# Altium PCB uz_frontpanel_main-mini.PcbDoc
Units mm, origin at the board's own origin, x right, y up, seen from the top; angles counter-clockwise.
Board outline 22 x 53.5 mm, 8 copper layers (Top Layer, Int1 (GND), Int2 (Sign), Int3 (Sign), Int4 (Sign), Int5 (Sign), Int6 (GND), Bottom Layer), stack 1.6 mm thick; 38 components, 81 nets, 194 pads, 58 vias.
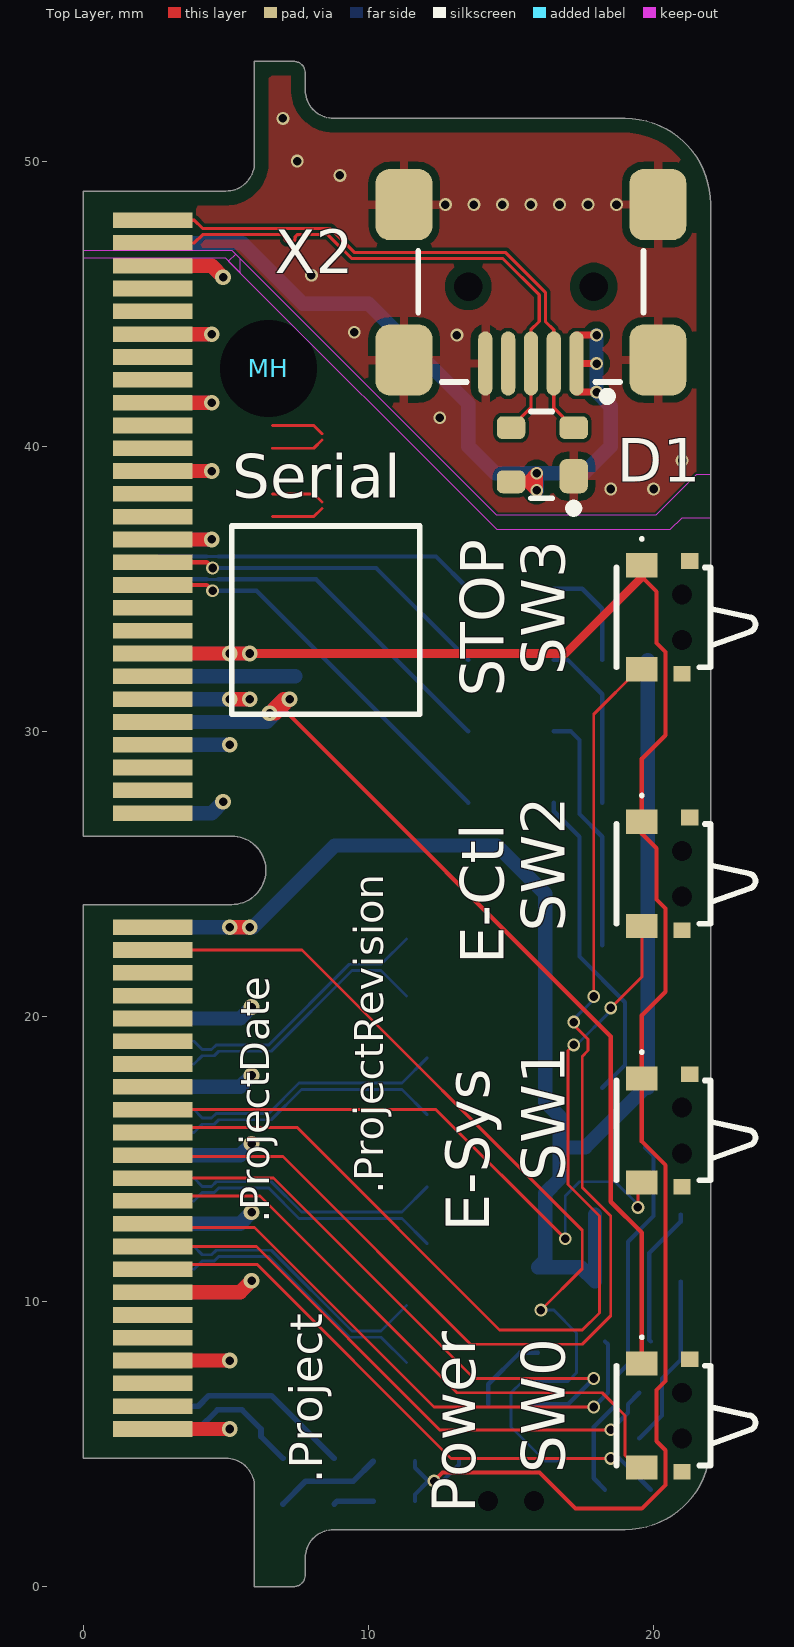
[diagram p0: Top Layer view]
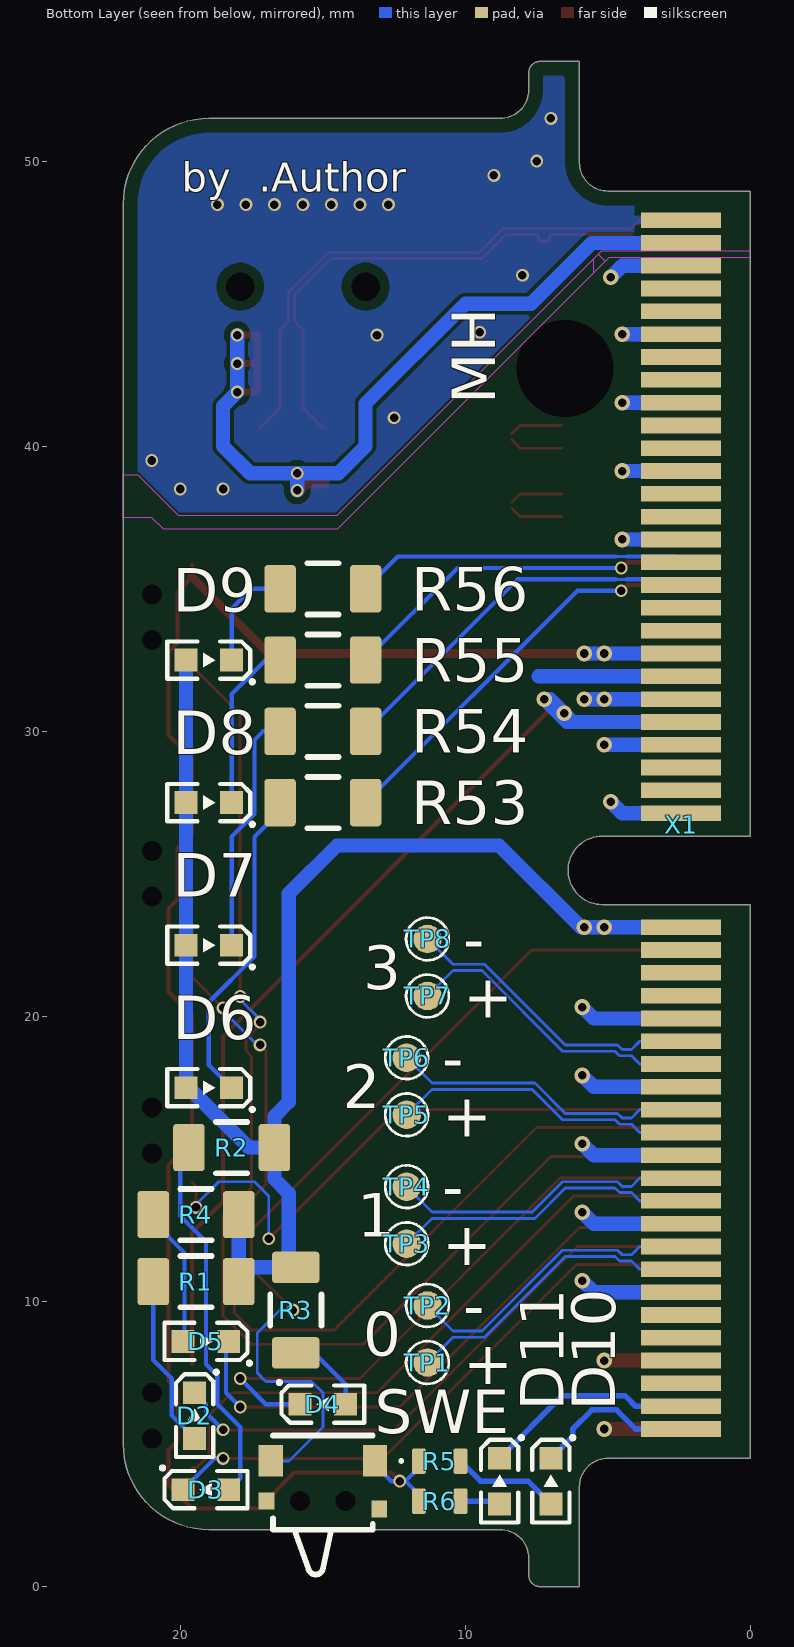
[diagram p1: Bottom Layer view, seen from below]
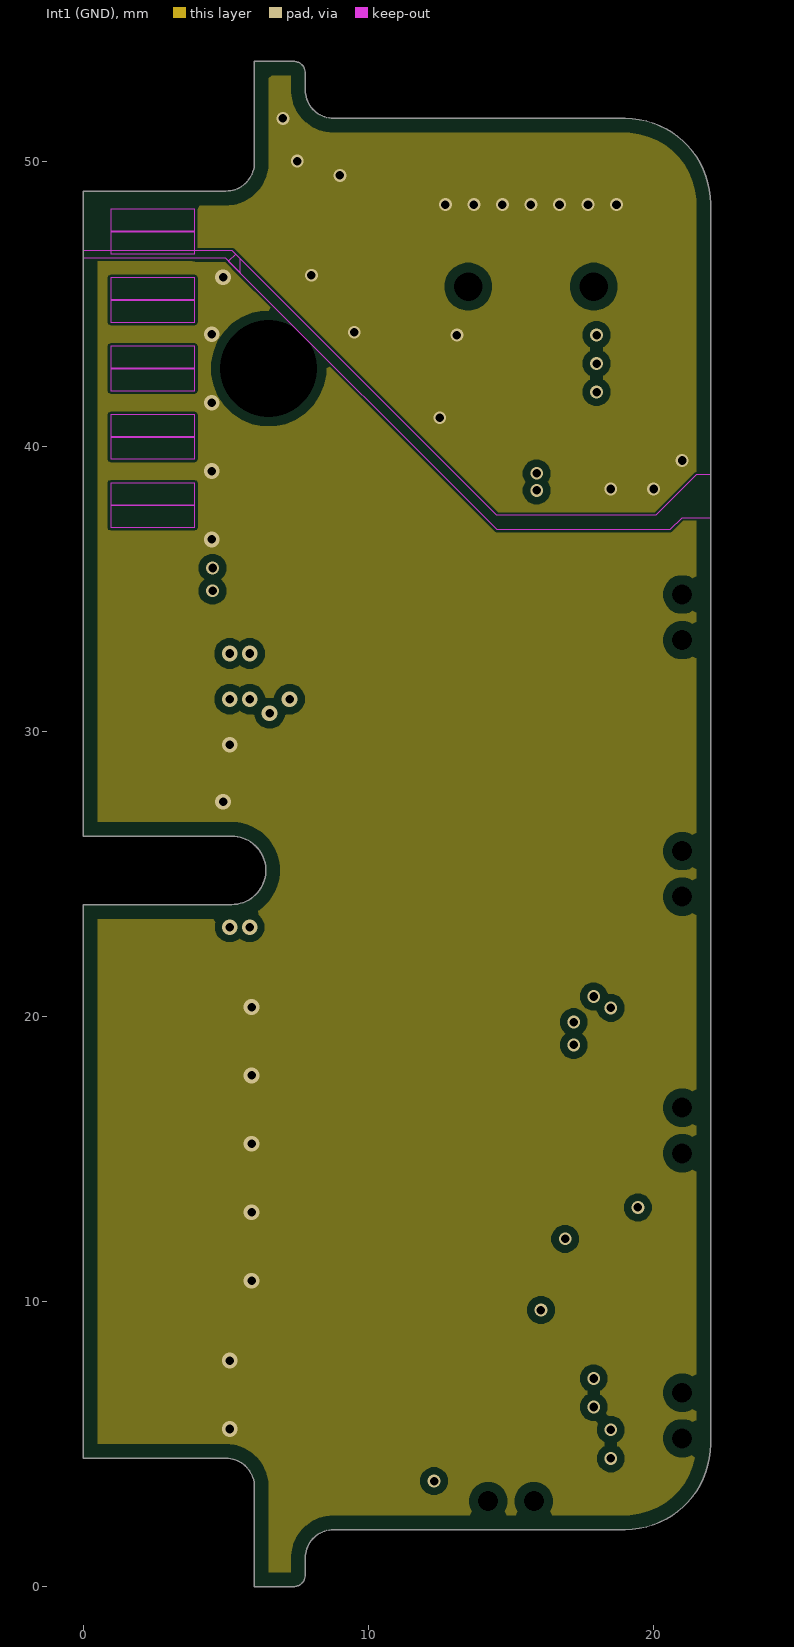
[diagram p2: Int1 (GND)]
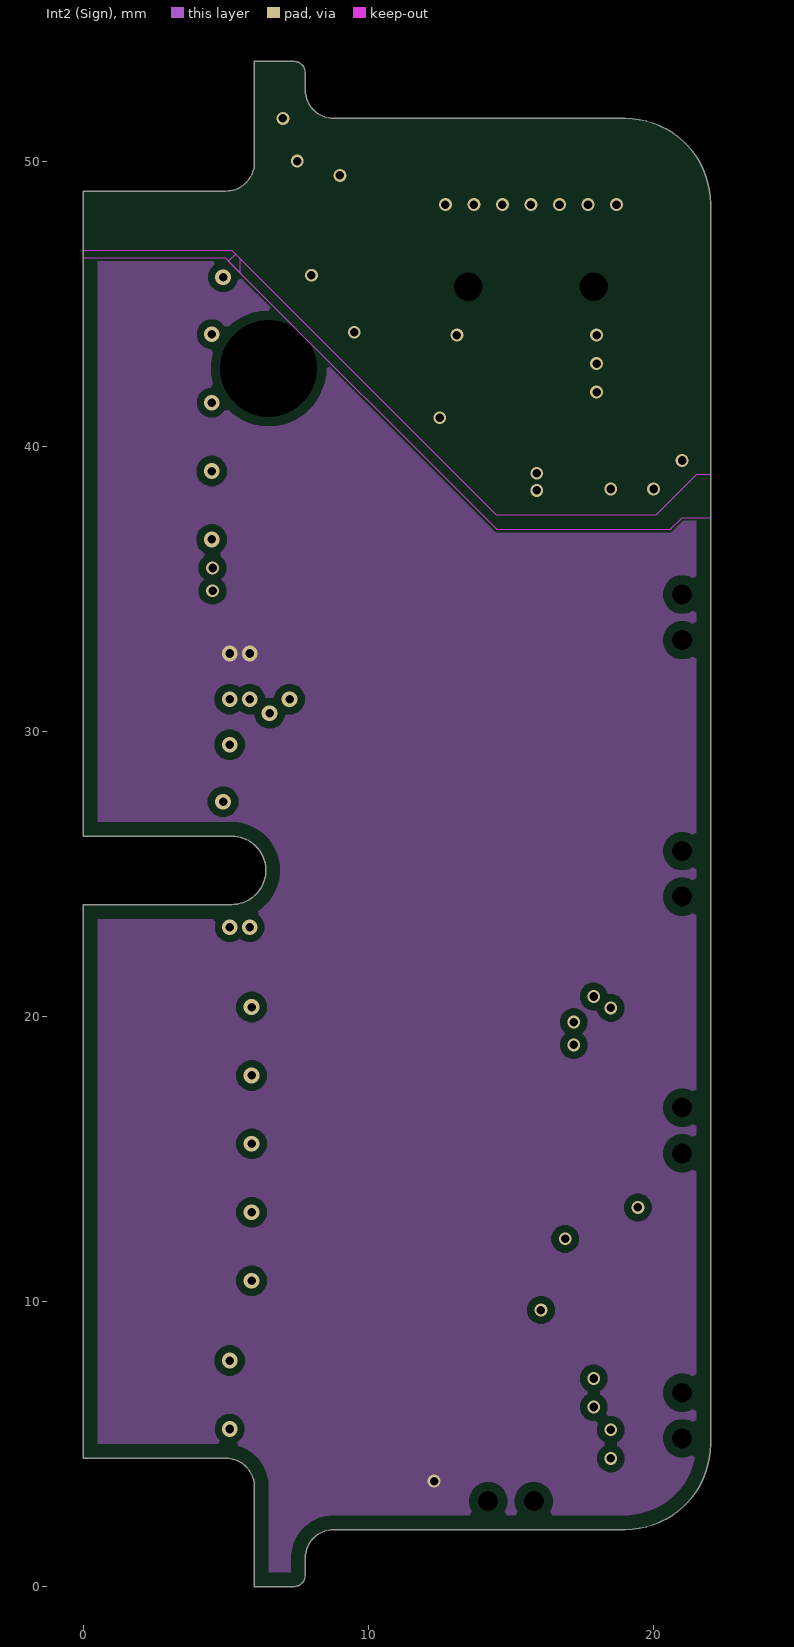
[diagram p3: Int2 (Sign)]
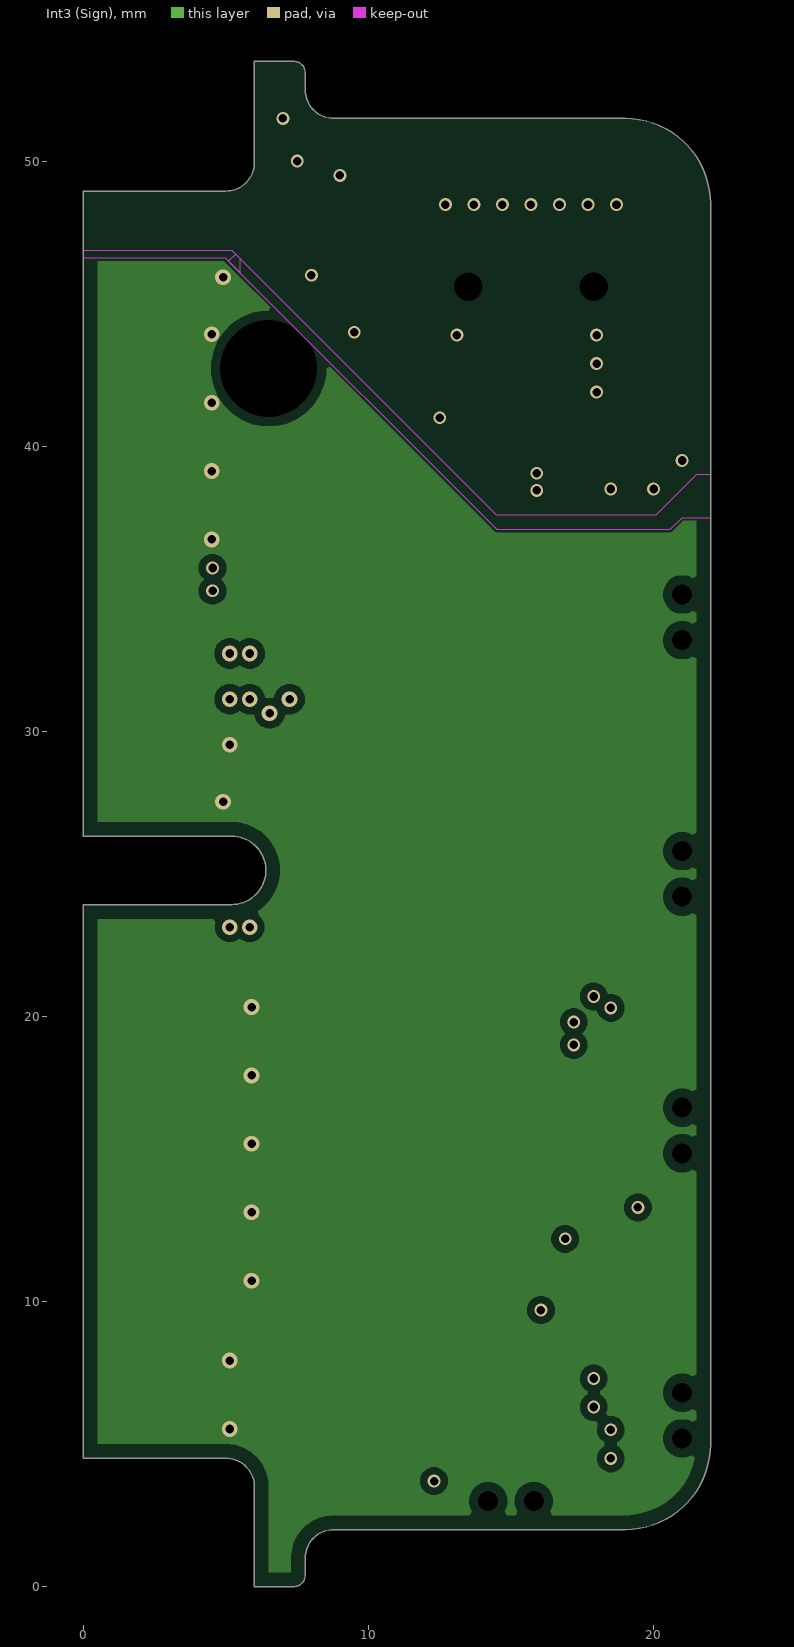
[diagram p4: Int3 (Sign)]
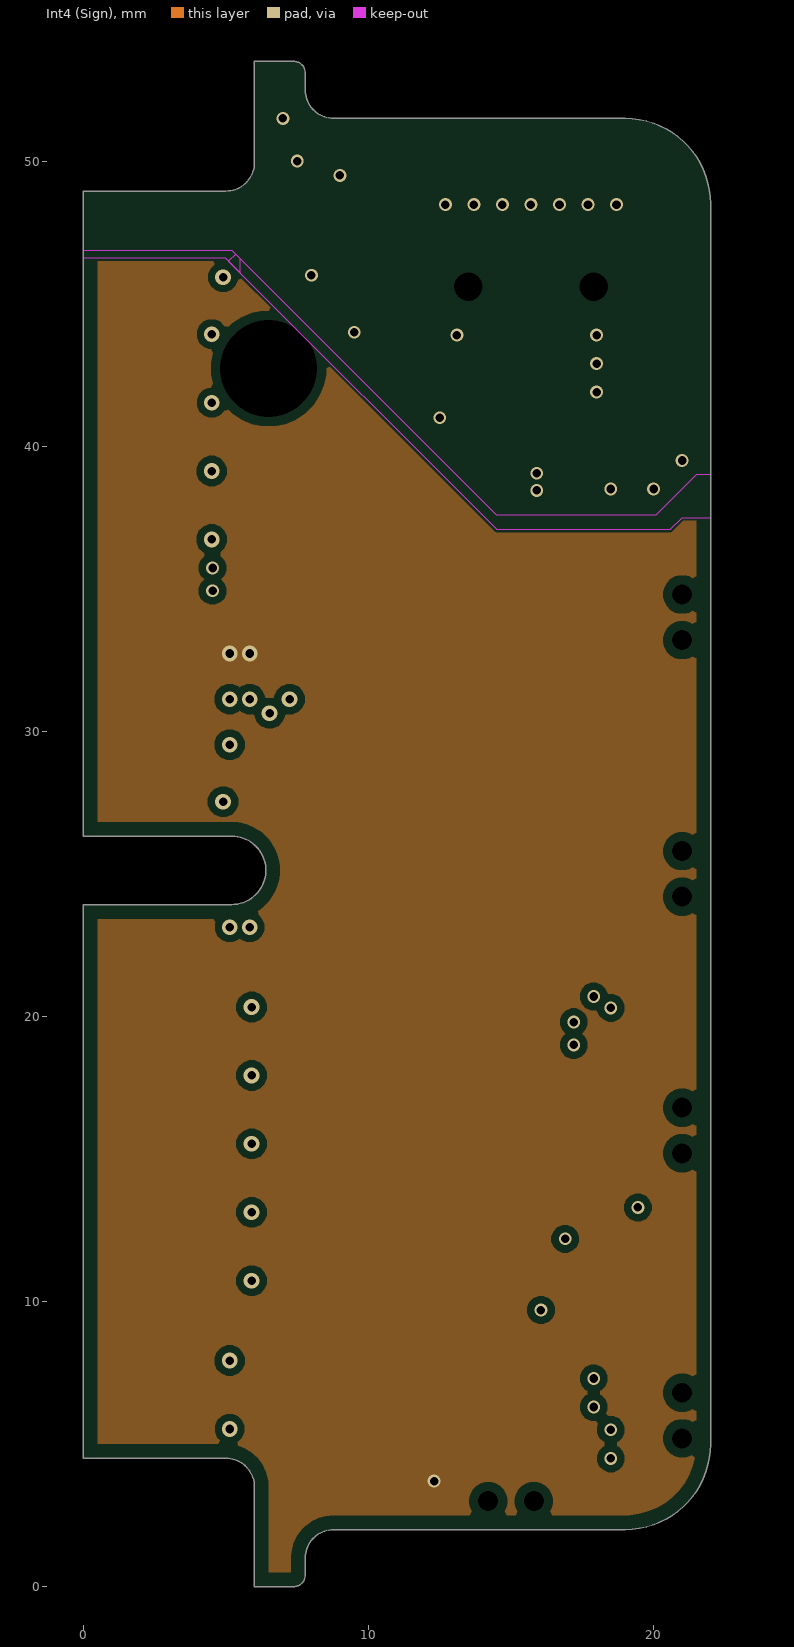
[diagram p5: Int4 (Sign)]
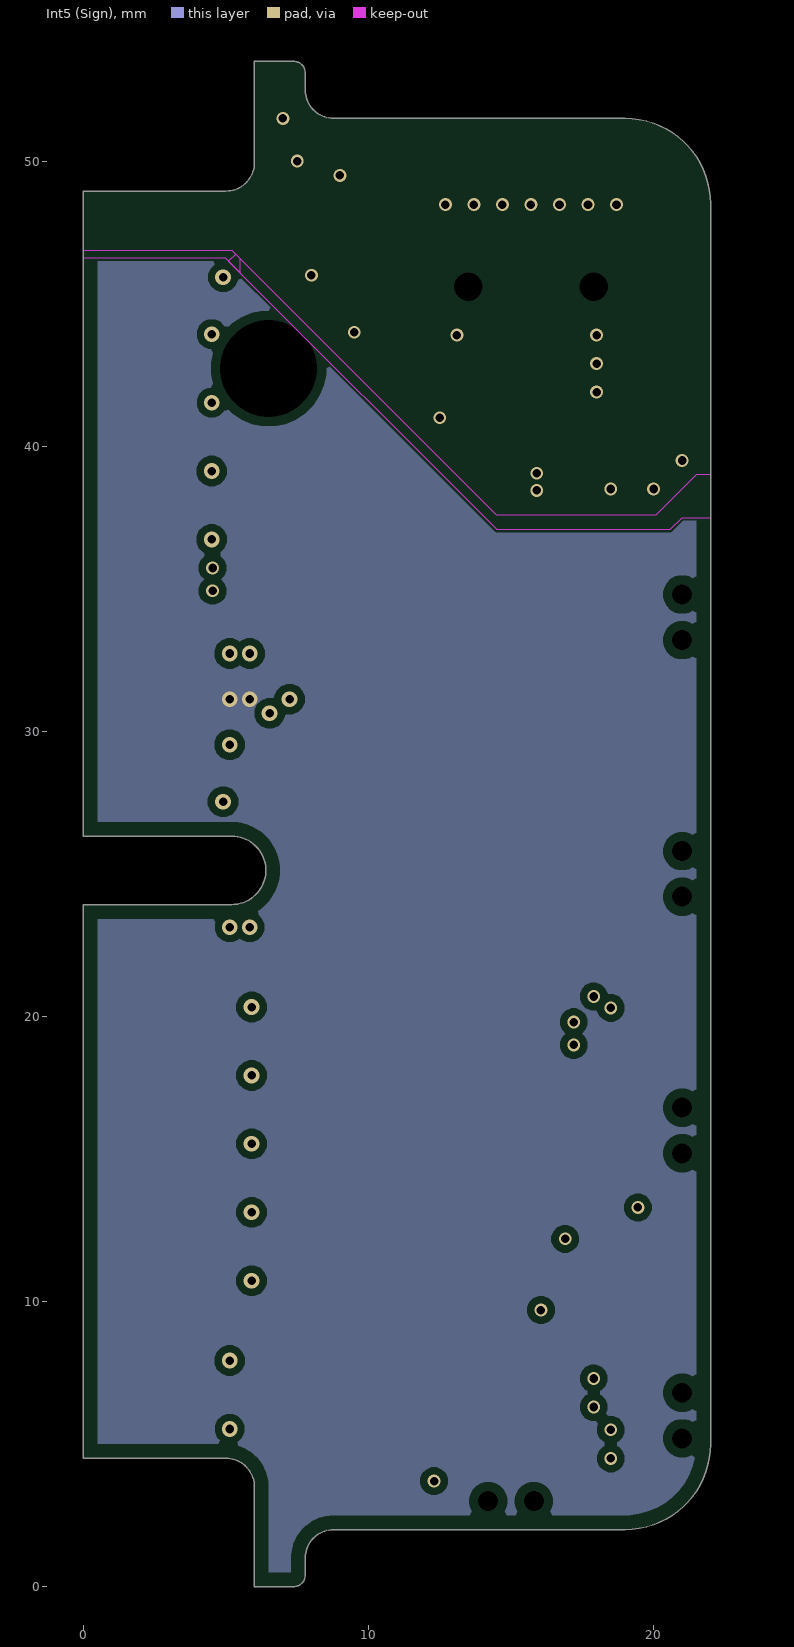
[diagram p6: Int5 (Sign)]
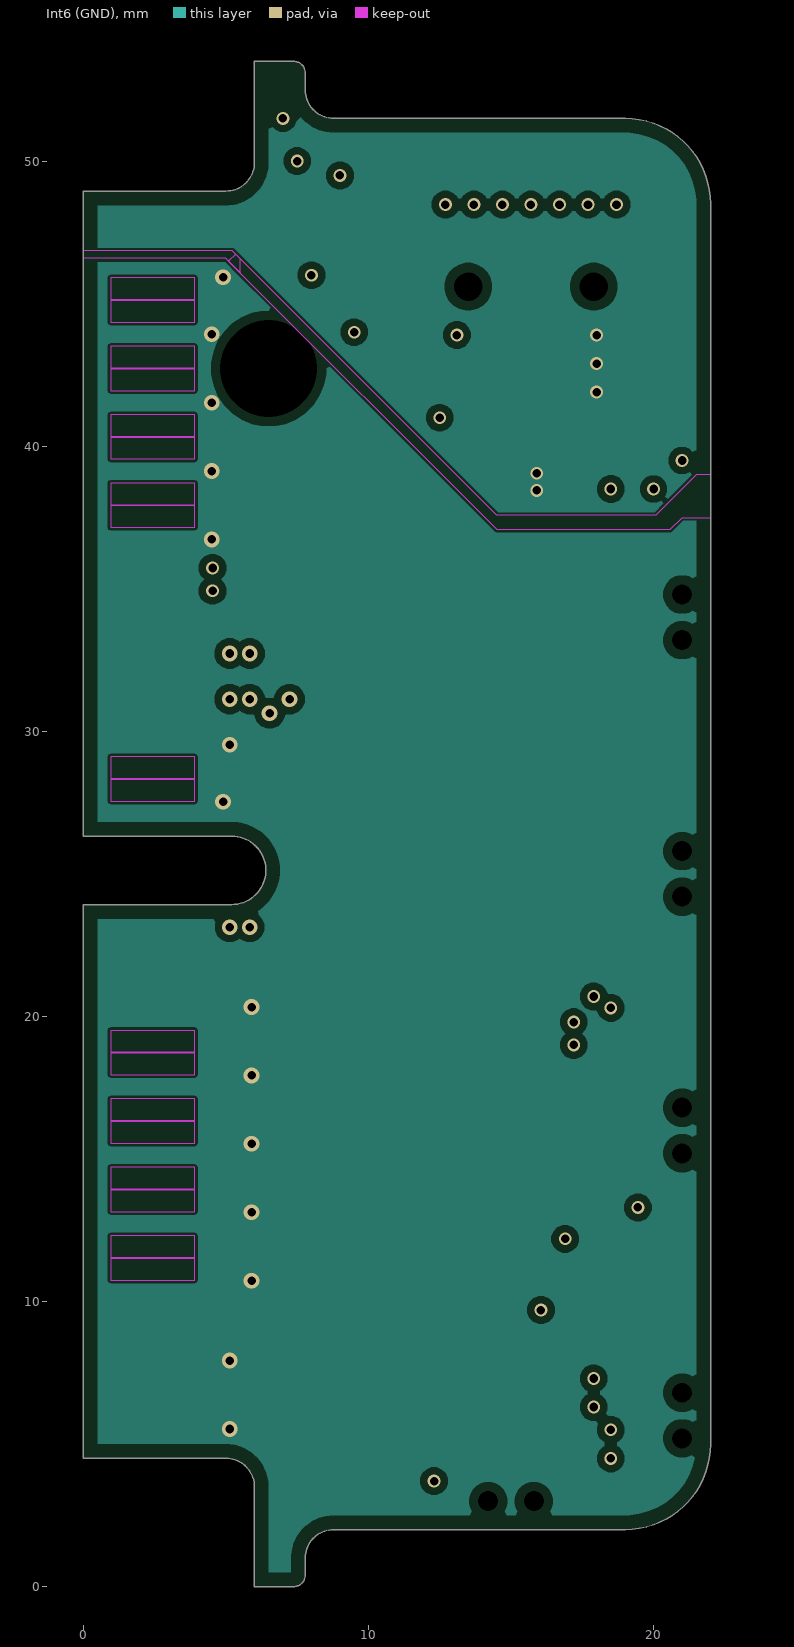
[diagram p7: Int6 (GND)]
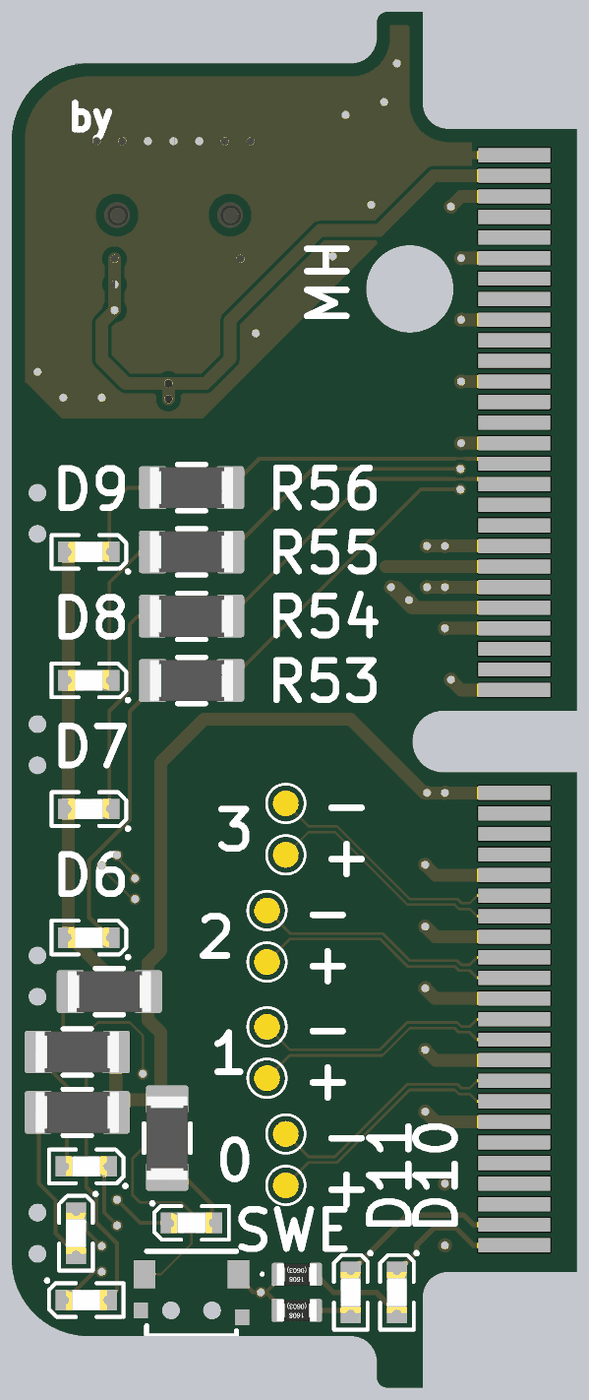
[diagram p8: 3D render of the assembled board from below, using the file's embedded part models]

## Layer stack, top to bottom
Top Solder: solder mask 0.0305, SM-001, Dk 3.8
Top Layer: signal copper 0.035
Dielectric 1: prepreg 0.1164, PP-016, Dk 4.16
Int1 (GND): signal copper 0.0152
Dielectric 3: core 0.3, Core-027, Dk 4.6
Int2 (Sign): signal copper 0.0152
Dielectric 4: prepreg 0.0764, PP-008, Dk 3.91
Dielectric 5: prepreg 0.0764, PP-008, Dk 3.91
Int3 (Sign): signal copper 0.0152
Dielectric 6: core 0.3, Core-027, Dk 4.6
Int4 (Sign): signal copper 0.0152
Dielectric 7: prepreg 0.0764, PP-008, Dk 3.91
Dielectric 8: prepreg 0.0764, PP-008, Dk 3.91
Int5 (Sign): signal copper 0.0152
Dielectric 9: core 0.3, Core-027, Dk 4.6
Int6 (GND): signal copper 0.0152
Dielectric 11: prepreg 0.1164, PP-016, Dk 4.16
Bottom Layer: signal copper 0.035
Bottom Solder: solder mask 0.0305, SM-001, Dk 3.8

## Board outline
0,4.5 5,4.5 cw(c5,3.5) 6,3.5 6,0 7.38,0 ccw(c7.38,0.4) 7.78,0.4 7.78,1 cw(c8.78,1) 8.78,2 19,2 ccw(c19,5) 22,5 22,48.5 ccw(c19,48.5) 19,51.5 8.78,51.5 cw(c8.78,52.5) 7.78,52.5 7.78,53.1 ccw(c7.38,53.1) 7.38,53.5 6,53.5 6,50 6,49.95 cw(c5,49.95) 5,48.95 0,48.95 0,26.325 5.2,26.325 cw(c5.2,25.125) 5.2,23.925 0,23.925

## Design rules (kind name [scope] priority, off if disabled: settings)
AssemblyTestPointUsage [InNetClass('3V3_SingleEnded') or InNetClass('5V_SingleEnded') or InNetClass('15V_SingleEnded') or InNetClass('DifferentialSignals')] p1:
BoardOutlineClearance [All] p1: gap=0.5 ignorepadtopadclearanceinfootprint=FALSE except(0: Arc-SplitContinuation Track-SplitContinuation SMDPad-SplitContinuation THPad-SplitContinuation Via-SplitContinuation Fill-SplitContinuation Poly-SplitContinuation Region-SplitContinuation Text-SplitContinuation)
Clearance Clearance_Diff2Diff [InNetClass('D100') OR InNetClass('MGT') OR InNetClass('USB')] p1: gap=0.127 ignorepadtopadclearanceinfootprint=TRUE except(0: Text-Hole; 0.1: Arc-Text Track-Text SMDPad-Text THPad-Text Via-Text Fill-Text Poly-Text Region-Text Text-Text; 0.2: Arc-SMDPad Arc-THPad Arc-Via Track-SMDPad Track-THPad Track-Via SMDPad-THPad SMDPad-Via Via-Via; 0.254: THPad-Fill THPad-Poly THPad-Region Via-Fill Via-Poly Via-Region; 0.325: Via-Hole; 0.33: Arc-Hole Track-Hole SMDPad-Hole THPad-Hole Fill-Hole Poly-Hole Region-Hole; 0.35: THPad-Via; 0.5: THPad-THPad Fill-Fill Fill-Poly Fill-Region Poly-Poly Poly-Region Region-Region; 0.57: Arc-Arc Arc-Track Track-Track)
Clearance Clearance_Diff2!DiffOrPwr [InNetClass('D100') OR InNetClass('MGT') OR InNetClass('USB') vs NOT ( InNetClass('D100') OR InNetClass('MGT') OR InNetClass('USB') OR InNetClass('PWR') )] p2: gap=0.127 ignorepadtopadclearanceinfootprint=TRUE except(0: Text-Hole; 0.1: Arc-Text Track-Text SMDPad-Text THPad-Text Via-Text Fill-Text Poly-Text Region-Text Text-Text; 0.2: Arc-SMDPad Arc-THPad Arc-Via Track-SMDPad Track-THPad Track-Via SMDPad-THPad SMDPad-Via Via-Via; 0.254: THPad-Fill THPad-Poly THPad-Region Via-Fill Via-Poly Via-Region; 0.325: Via-Hole; 0.33: Arc-Hole Track-Hole SMDPad-Hole THPad-Hole Fill-Hole Poly-Hole Region-Hole; 0.35: THPad-Via; 0.5: THPad-THPad Fill-Fill Fill-Poly Fill-Region Poly-Poly Poly-Region Region-Region; 0.57: Arc-Arc Arc-Track Track-Track)
Clearance ClearanceNetsDifferent [All] p3: gap=0.1 ignorepadtopadclearanceinfootprint=TRUE except(0: Region-Hole Text-Hole; 0.12: Track-Via; 0.127: Track-Fill Track-Poly Track-Region SMDPad-SMDPad SMDPad-Fill SMDPad-Poly SMDPad-Region; 0.2: Track-SMDPad Track-THPad Track-Hole SMDPad-THPad SMDPad-Via Via-Via; 0.254: THPad-Fill THPad-Poly THPad-Region Via-Fill Via-Poly Via-Region; 0.325: Via-Hole; 0.33: Arc-Hole SMDPad-Hole THPad-Hole Fill-Hole Poly-Hole; 0.35: THPad-Via; 0.5: THPad-THPad Fill-Fill Poly-Poly Region-Region)
Clearance ClearanceNetsSame [All] p4: gap=0.1 ignorepadtopadclearanceinfootprint=TRUE except(0: Arc-Arc Arc-Track SMDPad-Via Via-Via Region-Hole Text-Hole; 0.127: Track-Fill Track-Poly Track-Region SMDPad-SMDPad SMDPad-Fill SMDPad-Poly SMDPad-Region; 0.129: Via-Hole; 0.2: SMDPad-THPad; 0.254: Track-Hole SMDPad-Hole THPad-Fill THPad-Poly THPad-Region Via-Fill Via-Poly Via-Region; 0.33: Arc-Hole THPad-Hole Fill-Hole Poly-Hole; 0.35: THPad-Via; 0.5: THPad-THPad Fill-Fill Poly-Poly Region-Region)
ComponentClearance [All] p1: gap=0.1 collisioncheckmode=3 verticalgap=0.1 showdistances=FALSE
DiffPairsRouting DiffPairsRouting_D100 [InNetClass('D100') OR InNetClass('MGT')] p1: maxlimit=0.167 minlimit=0.122 mostfreqgap=0.167 toplayer_mingap=0.122 toplayer_maxgap=0.122 toplayer_prefgap=0.122 toplayer_minwidth=0.1 toplayer_maxwidth=0.1 toplayer_prefwidth=0.1 midlayer2_maxgap=0.122 midlayer2_prefgap=0.122 midlayer2_minwidth=0.1 midlayer2_maxwidth=0.1 midlayer2_prefwidth=0.1 midlayer3_maxgap=0.122 midlayer3_prefgap=0.122 midlayer3_minwidth=0.1 midlayer3_maxwidth=0.1 midlayer3_prefwidth=0.1 bottomlayer_mingap=0.122 bottomlayer_maxgap=0.122 bottomlayer_prefgap=0.122 bottomlayer_minwidth=0.1 bottomlayer_maxwidth=0.1 bottomlayer_prefwidth=0.1 impedanceprofiledriven=TRUE impedanceprofileid={92C7DD9C-2956-4AB4-8EC1-0CC9A5262CD3} impedanceprofilevalue=100.000000 maxuncoupledlength=12.7
DiffPairsRouting DiffPairsRouting_USB [InNetClass('USB')] p2: maxlimit=0.102 minlimit=0.1 mostfreqgap=0.1 toplayer_maxgap=0.1 toplayer_minwidth=0.114 toplayer_maxwidth=0.114 toplayer_prefwidth=0.114 midlayer2_maxgap=0.1 midlayer2_minwidth=0.118 midlayer2_maxwidth=0.118 midlayer2_prefwidth=0.118 midlayer3_maxgap=0.1 midlayer3_minwidth=0.118 midlayer3_maxwidth=0.118 midlayer3_prefwidth=0.118 bottomlayer_maxgap=0.1 bottomlayer_minwidth=0.114 bottomlayer_maxwidth=0.114 bottomlayer_prefwidth=0.114 impedanceprofiledriven=TRUE impedanceprofileid={0D8B0DFD-34C5-4572-9476-DD2B079BA94C} impedanceprofilevalue=90.000000 maxuncoupledlength=12.7
DiffPairsRouting DiffPairsRouting_CatchAll [IsDifferentialPair] p3: maxlimit=5 minlimit=0.254 mostfreqgap=5 toplayer_mingap=5 toplayer_minwidth=1 toplayer_maxwidth=1 toplayer_prefwidth=1 midlayer1_mingap=5 midlayer1_minwidth=1 midlayer1_maxwidth=1 midlayer1_prefwidth=1 midlayer2_mingap=5 midlayer2_minwidth=1 midlayer2_maxwidth=1 midlayer2_prefwidth=1 midlayer3_mingap=5 midlayer3_minwidth=1 midlayer3_maxwidth=1 midlayer3_prefwidth=1 midlayer4_mingap=5 midlayer4_minwidth=1 midlayer4_maxwidth=1 midlayer4_prefwidth=1 midlayer5_maxgap=0.254 midlayer5_prefgap=0.254 midlayer5_minwidth=0.381 midlayer5_maxwidth=0.381 midlayer5_prefwidth=0.381 midlayer6_maxgap=0.254 midlayer6_prefgap=0.254 midlayer6_minwidth=0.381 midlayer6_maxwidth=0.381 midlayer6_prefwidth=0.381 bottomlayer_mingap=5 bottomlayer_minwidth=1 bottomlayer_maxwidth=1 bottomlayer_prefwidth=1 maxuncoupledlength=12.7 // ... with obviously-unrealistic values to alert the designer
FanoutControl Fanout_Power [InNetClass('Power') or InNet('ENABLE')] p1: bgadir=Out bgaviamode=Centered fanoutstyle=Auto fanoutdirection=None viagrid=0.025
FanoutControl Fanout_RS422 [InNetClass('DifferentialSignals')] p2: bgadir=Out bgaviamode=Closest fanoutstyle=Rows fanoutdirection=OutOnly viagrid=0.025
FanoutControl Fanout_BGA [IsBGA] p3 off: bgadir=Out bgaviamode=Centered fanoutstyle=Auto fanoutdirection=Alternating viagrid=0.025 // Fanout_BGA (Default Rule)
FanoutControl Fanout_LCC [IsLCC] p4 off: bgadir=Out bgaviamode=Centered fanoutstyle=Auto fanoutdirection=Alternating viagrid=0.025 // Fanout_LCC (Default Rule)
FanoutControl Fanout_SOIC [IsSOIC] p5 off: bgadir=Out bgaviamode=Centered fanoutstyle=Auto fanoutdirection=Alternating viagrid=0.025 // Fanout_SOIC (Default Rule)
FanoutControl Fanout_Small [(CompPinCount < 5)] p6 off: bgadir=Out bgaviamode=Centered fanoutstyle=Auto fanoutdirection=OutThenIn viagrid=0.025 // Fanout_Small (Default Rule)
FanoutControl Fanout_Default [All] p7: bgadir=NE bgaviamode=Closest fanoutstyle=Rows fanoutdirection=InOnly viagrid=0.025 // Fanout_Default (Default Rule)
Height [All] p1: minheight=0 maxheight=50 prefheight=12.7
HoleSize [All] p1: absolutevalues=TRUE maxlimit=6.3 minlimit=0.2 maxpercent=80.000 minpercent=20.000
MatchedLengths MatchedLengthsIntra [InDifferentialPairClass('All Differential Pairs')  OR InxSignalClass('All xSignals')] p1: tolerance=0.127 checknetsindiffpair=TRUE checkdiffpairvsdiffpair=FALSE checkxsignals=FALSE checkothers=FALSE
MatchedLengths MatchedLengthsInter_ETH0 [InDifferentialPair('ETH0_0')  OR InDifferentialPair('ETH0_1')  OR InDifferentialPair('ETH0_2')  OR InDifferentialPair('ETH0_3')] p2: tolerance=0.508 checknetsindiffpair=FALSE checkdiffpairvsdiffpair=TRUE checkxsignals=TRUE checkothers=TRUE
MatchedLengths MatchedLengthsInter_MDI1R [InDifferentialPair('MDI1R_0')  OR InDifferentialPair('MDI1R_1')  OR InDifferentialPair('MDI1R_2')  OR InDifferentialPair('MDI1R_3')] p3: tolerance=0.508 checknetsindiffpair=FALSE checkdiffpairvsdiffpair=TRUE checkxsignals=TRUE checkothers=TRUE
MatchedLengths MatchedLengthsInter_CatchD100 [InNetClass('D100') AND NOT ( InDifferentialPair('ETH0_0')  OR InDifferentialPair('ETH0_1')  OR InDifferentialPair('ETH0_2')  OR InDifferentialPair('ETH0_3')  OR InDifferentialPair('MDI1R_0')  OR InDifferentialPair('MDI1R_1')  OR InDifferentialPair('MDI1R_2')  OR InDifferentialPair('MDI1R_3') )] p4: tolerance=0.01 checknetsindiffpair=FALSE checkdiffpairvsdiffpair=TRUE checkxsignals=TRUE checkothers=TRUE
PlaneConnect [All] p1: planeconnectstyle=Direct reliefexpansion=0.508 reliefentries=4 reliefconductorwidth=0.254 reliefairgap=0.254
PolygonConnect PolygonConnect_Therm [HoleSize > 2.6] p1: connectstyle=Direct reliefconductorwidth=0.254 reliefentries=4 polygonreliefangle="90 Angle" airgapwidth=0.254
PolygonConnect PolygonConnect_via [InPadClass('pad') or IsVia] p2: connectstyle=Direct reliefconductorwidth=0.254 reliefentries=4 polygonreliefangle="90 Angle" airgapwidth=0.254
PolygonConnect [All] p3: connectstyle=Relief reliefconductorwidth=0.3 reliefentries=4 polygonreliefangle="90 Angle" airgapwidth=0.25
RoutingLayers RoutingLayers_3V3Signals [InNetClass('3V3_SingleEnded')] p1 off: top layer_v5=TRUE mid layer 1_v5=TRUE mid layer 2_v5=TRUE mid layer 3_v5=TRUE mid layer 4_v5=TRUE mid layer 5_v5=TRUE mid layer 6_v5=TRUE bottom layer_v5=TRUE
RoutingLayers RoutingLayers_SingleEnded [InNetClass('15V_SingleEnded') or InNetClass('3V3_SingleEnded') or InNetClass('5V_SingleEnded')] p2 off: top layer_v5=TRUE mid layer 1_v5=TRUE mid layer 2_v5=TRUE mid layer 3_v5=TRUE mid layer 4_v5=TRUE mid layer 5_v5=TRUE mid layer 6_v5=TRUE bottom layer_v5=TRUE
RoutingLayers RoutingLayers_Differential [InNetClass('DifferentialSignals')] p3 off: top layer_v5=TRUE mid layer 1_v5=TRUE mid layer 2_v5=TRUE mid layer 3_v5=TRUE mid layer 4_v5=TRUE mid layer 5_v5=TRUE mid layer 6_v5=TRUE bottom layer_v5=FALSE
RoutingLayers [All] p4: top layer_v5=TRUE mid layer 1_v5=TRUE mid layer 2_v5=TRUE mid layer 3_v5=TRUE mid layer 4_v5=TRUE mid layer 5_v5=TRUE mid layer 6_v5=TRUE bottom layer_v5=TRUE
RoutingVias [All] p1: holewidth=0.3 width=0.5 viastyle="Through Hole" minholewidth=0.2 minwidth=0.4 maxholewidth=0.5 maxwidth=1
SolderMaskExpansion [All] p1: expansion=0.008 istentingtop=FALSE
UnRoutedNet UnRoutedNet_Signals [InNetClass('15V_SingleEnded') or InNetClass('3V3_SingleEnded') or InNetClass('5V_SingleEnded') or InNetClass('DifferentialSignals')] p1: checkbadconnections=TRUE
UnRoutedNet [All] p2: checkbadconnections=TRUE
Width Width_S50 [InNetClass('S50')] p1: maxlimit=0.184 minlimit=0.133 preferedwidth=0.172 toplayer_minwidth=0.184 toplayer_prefwidth=0.184 midlayer2_minwidth=0.172 midlayer2_maxwidth=0.172 midlayer3_minwidth=0.172 midlayer3_maxwidth=0.172 bottomlayer_minwidth=0.184 bottomlayer_prefwidth=0.184 impedanceprofiledriven=TRUE impedanceprofileid={DBC48055-3BDD-4D29-A398-A49D5C7E61E7} impedanceprofilevalue=50.000000 minimp=50.000000 maximp=50.000000 favimp=50.000000
Width Width_Power [InNetClass('Pwr')] p2: maxlimit=10 minlimit=0.2 preferedwidth=0.4 midlayer5_minwidth=0.254 midlayer5_maxwidth=0.254 midlayer5_prefwidth=0.254 midlayer6_minwidth=0.254 midlayer6_maxwidth=0.254 midlayer6_prefwidth=0.254 minimp=50.000000 maximp=50.000000 favimp=50.000000
Width [All] p3: maxlimit=10 minlimit=0.1 preferedwidth=0.15 toplayer_prefwidth=0.3 midlayer5_prefwidth=0.1 midlayer6_prefwidth=0.1 bottomlayer_prefwidth=0.3 minimp=50.000000 maximp=50.000000 favimp=50.000000
17 further rules are at their usual default settings.

## Classes and differential pairs
component class uz_frontpanel_main-mini: D1 D2 D3 D4 D5 D10 D11 MH R1 R2 R3 R4 R5 R6 Serial SW0 SW1 SW2 SW3 SWe TP1 TP2 TP3 TP4 TP5 TP6 TP7 TP8 X2
net class PWR: GND isoGND V_BUS VIN
net class USB: D_USB_N D_USB_P
net class MGT: B505_CLKa_N B505_CLKa_P GTR1_RX_N GTR1_RX_P GTR1_TX_N GTR1_TX_P GTR2_RX_N GTR2_RX_P GTR2_TX_N GTR2_TX_P
net class D100: ETH0_0_N ETH0_0_P ETH0_1_N ETH0_1_P ETH0_2_N ETH0_2_P ETH0_3_N ETH0_3_P
component class U_TestLEDs: D6 D7 D8 D9 R53 R54 R55 R56
component class X1: X1
differential pair GTR2_TX: +GTR2_TX_P -GTR2_TX_N
differential pair GTR2_RX: +GTR2_RX_P -GTR2_RX_N
differential pair GTR1_TX: +GTR1_TX_P -GTR1_TX_N
differential pair GTR1_RX: +GTR1_RX_P -GTR1_RX_N
differential pair ETH0_3: +ETH0_3_P -ETH0_3_N
differential pair ETH0_2: +ETH0_2_P -ETH0_2_N
differential pair ETH0_1: +ETH0_1_P -ETH0_1_N
differential pair ETH0_0: +ETH0_0_P -ETH0_0_N
differential pair D_USB: +D_USB_P -D_USB_N
differential pair B505_CLKa: +B505_CLKa_P -B505_CLKa_N

## Components (designator, comment, footprint, x,y, rotation, side; value= is the part's Value field where it differs from the comment)
D1 "PRTR5V0U2X,215" SOT-143B-4 16.075,39.7 r180 top
D2 "LED Red" WL-SMCW_0603 19.5,6 r270 bottom
D3 "LED Blue" WL-SMCW_0603 19.1,3.4 r180 bottom
D4 "LED Red" WL-SMCW_0603 15,6.4 r180 bottom
D5 "LED Green" WL-SMCW_0603 19.1,8.6 r0 bottom
D6 "LED Green" WL-SMCW_0603 19,17.5 r0 bottom
D7 "LED Green" WL-SMCW_0603 19,22.5 r0 bottom
D8 "LED Red" WL-SMCW_0603 19,27.5 r0 bottom
D9 "LED Green" WL-SMCW_0603 19,32.5 r0 bottom
D10 "LED Green" WL-SMCW_0603 7,3.7 r270 bottom
D11 "LED Red" WL-SMCW_0603 8.8,3.7 r270 bottom
MH "Mounting Hole" MH_3.4 6.5,42.73 r90 top
R1 "2k2" R_1206_TE 19.45,10.7 r90 bottom
R2 "2k2" R_1206_TE 18.2,15.4 r90 bottom
R3 "2k2" R_1206_TE 15.95,9.7 r0 bottom
R4 "2k2" R_1206_TE 19.45,13.05 r90 bottom
R5 "220R" R_0603_TE 10.9,4.4 r270 bottom
R6 "220R" R_0603_TE 10.9,3 r270 bottom
R53 "2k2" R_1206_TE 15,27.5 r270 bottom
R54 "2k2" R_1206_TE 15,30 r270 bottom
R55 "2k2" R_1206_TE 15,32.5 r270 bottom
R56 "2k2" R_1206_TE 15,35 r270 bottom
Serial "Serial #" SERIAL 7.2,36 r0 top
SW0 "SPVS320100" SPVS320100 21.138,6 r270 top
SW1 "SPVS320100" SPVS320100 21.138,16 r270 top
SW2 "SPVS320100" SPVS320100 21.138,25 r270 top
SW3 "SPVS320100" SPVS320100 21.138,34 r270 top
SWE "SPVS320100" SPVS320100 15,2.862 r0 bottom (schematic designator SWe)
TP1 "Testpoint 1mm" TP_1mm 11.329,7.861 r180 bottom
TP2 "Testpoint 1mm" TP_1mm 11.329,9.861 r90 bottom
TP3 "Testpoint 1mm" TP_1mm 12.061,12.028 r90 bottom
TP4 "Testpoint 1mm" TP_1mm 12.061,14.028 r90 bottom
TP5 "Testpoint 1mm" TP_1mm 12.061,16.55 r90 bottom
TP6 "Testpoint 1mm" TP_1mm 12.061,18.55 r90 bottom
TP7 "Testpoint 1mm" TP_1mm 11.329,20.718 r90 bottom
TP8 "Testpoint 1mm" TP_1mm 11.329,22.718 r90 bottom
X1 "HSEC8-150-01-XX-DV-A-BL-CARD" HSEC8-150-01-XX-DV-A-BL-CARD 0.032,26.73 r270 bottom locked
X2 "Mini USB" "MINI_USB_5S_B _TYPE" 15.7,46.851 r180 top locked

## Footprints (in the part's own frame and the unit in brackets; to place one, negate y for a bottom-side part, rotate by r counter-clockwise, add the part's x,y. Pads: shape width x height; smd on the part's side, far side on the other; paste and mask are expansions set on the pad)
HSEC8-150-01-XX-DV-A-BL-CARD [mm]
  rect 0.55x2.8 smd far side mask+0.05: 1(-21.2,-2.4) 3(-20.4,-2.4) 5(-19.6,-2.4) 7(-18.8,-2.4) 9(-18,-2.4) 11(-17.2,-2.4) 13(-16.4,-2.4) 15(-15.6,-2.4) 17(-14.8,-2.4) 19(-14,-2.4) 21(-13.2,-2.4) 23(-12.4,-2.4) 25(-11.6,-2.4) 27(-10.8,-2.4) 29(-10,-2.4) 31(-9.2,-2.4) 33(-8.4,-2.4) 35(-7.6,-2.4) 37(-6.8,-2.4) 39(-6,-2.4) 41(-5.2,-2.4) 43(-4.4,-2.4) 45(-3.6,-2.4) 47(-2.8,-2.4) 49(-2,-2.4) 51(-1.2,-2.4) 53(-0.4,-2.4) 55(3.6,-2.4) 57(4.4,-2.4) 59(5.2,-2.4) 61(6,-2.4) 63(6.8,-2.4) 65(7.6,-2.4) 67(8.4,-2.4) 69(9.2,-2.4) 71(10,-2.4) 73(10.8,-2.4) 75(11.6,-2.4) 77(12.4,-2.4) 79(13.2,-2.4) 81(14,-2.4) 83(14.8,-2.4) 85(15.6,-2.4) 87(16.4,-2.4) 89(17.2,-2.4) 91(18,-2.4) 93(18.8,-2.4) 95(19.6,-2.4) 97(20.4,-2.4) 99(21.2,-2.4)
  rect 0.55x2.8 smd mask+0.05: 2(-21.2,-2.4) 4(-20.4,-2.4) 6(-19.6,-2.4) 8(-18.8,-2.4) 10(-18,-2.4) 12(-17.2,-2.4) 14(-16.4,-2.4) 16(-15.6,-2.4) 18(-14.8,-2.4) 20(-14,-2.4) 22(-13.2,-2.4) 24(-12.4,-2.4) 26(-11.6,-2.4) 28(-10.8,-2.4) 30(-10,-2.4) 32(-9.2,-2.4) 34(-8.4,-2.4) 36(-7.6,-2.4) 38(-6.8,-2.4) 40(-6,-2.4) 42(-5.2,-2.4) 44(-4.4,-2.4) 46(-3.6,-2.4) 48(-2.8,-2.4) 50(-2,-2.4) 52(-1.2,-2.4) 54(-0.4,-2.4) 56(3.6,-2.4) 58(4.4,-2.4) 60(5.2,-2.4) 62(6,-2.4) 64(6.8,-2.4) 66(7.6,-2.4) 68(8.4,-2.4) 70(9.2,-2.4) 72(10,-2.4) 74(10.8,-2.4) 76(11.6,-2.4) 78(12.4,-2.4) 80(13.2,-2.4) 82(14,-2.4) 84(14.8,-2.4) 86(15.6,-2.4) 88(16.4,-2.4) 90(17.2,-2.4) 92(18,-2.4) 94(18.8,-2.4) 96(19.6,-2.4) 98(20.4,-2.4) 100(21.2,-2.4)
MH_3.4 [mm]
  round 3.1 hole 3.4 unplated: 1(0,0)
"MINI_USB_5S_B _TYPE" [mm]
  oval 0.5x2.25 smd: 1(-1.6,3.95) 2(-0.8,3.951) 3(0,3.95) 4(0.8,3.951) 5(1.6,3.951)
  round 0 hole 1 unplated: A(-2.2,1.251) B(2.2,1.251)
  rrect50% 2x2.5 smd: S1(-4.45,3.825) S2(-4.45,-1.625) S3(4.45,-1.625) S4(4.45,3.825)
  silkscreen extent -3.95,0 3.95,5.2, body extent -4.77,-4.64 4.83,4.61, height 4.05
R_0603_TE [mm] "Vishay D0603 1.55 x 0.85 (+0.1/-0.05) 0.3 +/- 0,2mm Kontakte"
  rrect33% 0.9x0.5 smd: 1(0,0.73) 2(0,-0.73)
  body extent -0.42,-0.78 0.43,0.77, height 0.45
R_1206_TE [mm] "Vishay D1206 3.2 x 1.6 (+/- 0.15), 0.2mm - 0.6mm Kontakte"
  rrect20% 1.66x1.1 smd: 1(0,1.5) 2(0,-1.5)
  silkscreen extent -0.9,-0.55 0.9,0.55, body extent -0.8,-1.62 0.8,1.63, height 0.6
SERIAL [mm]
  silkscreen extent -2,-5.4 4.6,1.2
SOT-143B-4 [mm]
  rrect50% 1x1.2 smd: 1(-1.125,0.75)
  rrect50% 1x0.8 smd: 2(-1.125,-0.95) 3(1.075,-0.95) 4(1.075,0.95)
  silkscreen extent -1.27,-1.52 0.38,2.02, body extent -1.21,-1.44 1.21,1.48, height 1
SPVS320100 [mm]
  rect 0.85x1.1 smd: 1(-1.825,-1.548) 2(1.825,-1.548)
  round 0.35 hole 0.7 unplated: MH1(-0.8,-0.138) MH2(0.8,-0.138)
  rect 0.55x0.6 smd: MP1(-1.975,0.132) MP2(1.975,-0.138)
  silkscreen extent -2.8,-2.44 1.75,2.44
TP_1mm [mm]
  round 1 smd paste-1: 1(0,0)
  silkscreen extent -0.75,-0.75 0.75,0.75
WL-SMCW_0603 [mm] "SMD Mono-color Chip LED, body 1.6x0.8mm"
  rect 0.8x0.8 smd: 1(-0.8,0) 2(0.8,0)
  silkscreen extent -1.59,-0.65 1.45,0.83, body extent -0.8,-0.4 0.8,0.4, height 0.7

## Part data
D1: "ESD Suppressors / TVS Diodes PRTR5V0U2X/SOT143/SOT4", Device Package=SOT-143B-4, LCSC Part Number=C12333, Manufacturer=Nexperia, Operating Temperature="-40 to 85 °C", Supplier Part Number 1=771-PRTR5V0U2X-T/R, Component Type="TVS Diode, ESD", ComponentLink1Description=Datasheet, ComponentLink1URL=https://www.mouser.de/datasheet/2/916/PRTR5V0U2X-2938759.pdf, Created from=AGeiger, Created On="26.11.2023 17:14:11", Last Updated="26.11.2023 17:16:37", Live Cycle Status=1, Manufacturer Part Number=PRTR5V0U2X,215, Mounting Type=SMD, PartID=10, Supplier 1=Mouser, Supplier 2=LCSC, Supplier Part Number 2=C12333, Type=TVS-Diode
D2 D4 D8 D11: library part UZgen_LED_0603_Red, "Standard LEDs - SMD 0603 red", Color=red, Device Package=0603, Manufacturer=UZgen, Supplier Part Number 1='', Component Type="LED Diode", ComponentLink1Description=N/A, ComponentLink1URL=N/A, Created from=UZgenTool, Created On="09/09/2024 10:45:01", Last Updated="09/09/2024 10:45:01", Live Cycle Status=1, Manufacturer Part Number=UZgen_LED_0603_Red, Mounting Type=SMD, PartID=22, Stock number="not stored", Supplier 1=LCSC, Type=Standard
D3: library part UZgen_LED_0603_Blue, "Standard LEDs - SMD 0603 blue", Color=blue, Device Package=0603, Manufacturer=UZgen, Supplier Part Number 1='', Component Type="LED Diode", ComponentLink1Description=N/A, ComponentLink1URL=N/A, Created from=UZgenTool, Created On="09/09/2024 10:45:01", Last Updated="09/09/2024 10:45:01", Live Cycle Status=1, Manufacturer Part Number=UZgen_LED_0603_Blue, Mounting Type=SMD, PartID=20, Stock number="not stored", Supplier 1=LCSC, Type=Standard
D5 D6 D7 D9 D10: library part UZgen_LED_0603_Green, "Standard LEDs - SMD 0603 green", Color=green, Device Package=0603, Manufacturer=UZgen, Supplier Part Number 1='', Component Type="LED Diode", ComponentLink1Description=N/A, ComponentLink1URL=N/A, Created from=UZgenTool, Created On="09/09/2024 10:45:01", Last Updated="09/09/2024 10:45:01", Live Cycle Status=1, Manufacturer Part Number=UZgen_LED_0603_Green, Mounting Type=SMD, PartID=21, Stock number="not stored", Supplier 1=LCSC, Type=Standard
MH: Device Package=-, Component Type="Mounting Hole", ComponentLink1Description=Datasheet, Created from=MHlatky, Created On="26/01/2021 09:19:51", Last Updated="21/03/2022 23:05:12", Live Cycle Status=1, Manufacturer="Mounting Hole", Manufacturer Part Number="Mounting Hole", PartID=16, Stock number="not stored", Supplier 1="Mounting Hole", Supplier Part Number 1="Mounting Hole", Type="Mounting Hole"
R1 R2 R3 R4 R53 R54 R55 R56: library part UZgen_R_1206_2k2, "Generic resistor", Device Package=1206, Manufacturer=UZgen, Tolerance="1 %", Created from=UZgenTool, Created On="02/07/2024 17:29:56", Last Updated="02/07/2024 17:29:56", Manufacturer Part Number=UZgen_R_1206_2k2, Mounting Type=SMD, PartID=516
R5 R6: library part UZgen_R_0603_220R, "Generic resistor", Device Package=0603, Manufacturer=UZgen, Tolerance="1 %", Created from=UZgenTool, Created On="02/07/2024 17:29:49", Last Updated="02/07/2024 17:29:49", Manufacturer Part Number=UZgen_R_0603_220R, Mounting Type=SMD, PartID=205
Serial: library part 6, "Field to put in a serial number", Manufacturer="PCB Manufacturer", Manufacturer Part Number="Serial Number", Component Type="Serial Number", Created from="T. Wendt", Created On="02/03/2021 14:31:24", Last Updated="02/03/2021 14:31:24", Live Cycle Status=1, PartID=6, Type="Standard (No BOM)"
SW0 SW1 SW2 SW3 SWE: "Detector Switches 1 mAmp at 5 Volts 0.35 N", Device Package=THT, LCSC Part Number=C160855, Manufacturer="Alps Alpine", Supplier Part Number 1=688-SPVS320100, Component Type="Detector Switches", ComponentLink1Description=Datasheet, ComponentLink1URL=https://www.mouser.de/datasheet/2/15/SPVS-1370820.pdf, Created from=FRosner, Created On="19/09/2024 10:04:55", Last Updated="19/09/2024 10:04:55", Live Cycle Status=1, Manufacturer Part Number=SPVS320100, Mounting Type=SMD, PartID=45, Stock number="not stored", Supplier 1=Mouser, Supplier 2=LCSC, Supplier Part Number 2=C160855, Type="Detector Switch"
TP1 TP2 TP3 TP4 TP5 TP6 TP7 TP8: library part NULL, Component Type=Testpoint, Created=2018_06_25_AGeiger, Created from=AGeiger, Created On="20/09/2022 13:14:57", Last Updated="20/09/2022 13:15:39", Live Cycle Status=1, Manufacturer=NULL, Manufacturer Part Number=NULL, PartID=9, Supplier 1=NULL, Supplier Part Number 1=NULL, Type=Testpoint
X1: "Mating Card Layout for HSEC8-150-01-XX-DV-A-BL", Manufacturer=SAMTEC, Created=2018_04_23_AGeiger
X2: library part "MINI 5PTP", "1A 1 Surface Mount 5P Female -30℃~+80℃ SMD USB Connectors ROHS", LCSC Part Number=C2681563, Manufacturer="SHOU HAN", Operating Temperature="-30 °C to +80 °C", ComponentLink1Description=Datasheet, ComponentLink1URL=https://datasheet.lcsc.com/lcsc/2101221940_SHOU-HAN-MINI-5PTP_C2681563.pdf, Created from=AGeiger, Created On="26/11/2023 17:41:34", Last Updated="26/11/2023 17:41:34", Manufacturer Part Number="MINI 5PTP", Mounting Type=SMD, PartID=24, Series="Mini USB", Supplier 1=LCSC, Supplier Part Number 1=C2681563

## Via types
v1: diameter 0.45, hole 0.3, Top Layer to Bottom Layer, tented both sides, 36 vias
v2: diameter 0.55, hole 0.3, Top Layer to Bottom Layer, tented both sides, 22 vias

## Nets (pads, with @x,y where several pads share a name; then routed paths per layer and width w, separated by ;. In a path a pad name is that pad's centre, name@x,y a point inside that pad or via, vN(x,y) a via of type N, cw(c..) or ccw(c..) an arc to the next point about the centre after c; other vN are vias at no path point)
1V8_PER: X1.44 | length 4.1
  Top Layer w0.5: v2(5.132,31.13) v2(5.832,31.13)
  Bottom Layer w0.5: X1.44 v2(5.132,31.13) v2(5.832,31.13)
3V3_PER: R5.2 R6.2 SW1.1 SW2.1 SW3.1 SWE.1 X1.39 X1.40 | length 68.2
  Top Layer w0.15: v1(12.3,3.7) 12.6,4 16,4 17.26,2.74 19.59,2.74 20.415,3.565 20.415,4.785 20.1,5.1 20.1,6.9 20.415,7.215 20.415,14.785 19.59,15.61 SW1.1 19.59,20.04 20.415,20.865 20.415,23.785 20.1,24.1 20.1,25.9 19.59,26.41 SW2.1 19.59,29.04 20.415,29.865 20.415,32.785 20.1,33.1 20.1,34.9 19.59,35.41 SW3.1
  Top Layer w0.3: v2(5.832,32.73) 16.91,32.73 SW3.1@19.59,35.41
  Top Layer w0.5: X1.39 v2(5.132,32.73) v2(5.832,32.73)
  Bottom Layer w0.15: R6.2 11.63,3.23 v1@12.1,3.7 ; R5.2 11.63,4.17 v1@12.1,3.7 ; SWE.1 13.175,4.275 12.6,3.7 v1(12.3,3.7) v1@12.1,3.7
  Bottom Layer w0.5: X1.40 v2(5.132,32.73) v2(5.832,32.73)
3V3_S3C: SW0.1 X1.46 | length 36.7
  Top Layer w0.15: 6.782,30.88 6.92,30.88 6.951,30.849 18.5,19.3 18.5,13.5 19.59,12.41 SW0.1
  Top Layer w0.5: v2(6.532,30.63) 6.782,30.88 7.032,31.13 v2(7.232,31.13) 6.951,30.849 6.732,30.63 v2(6.532,30.63)
  Bottom Layer w0.5: X1.46 6.232,30.33 ; 6.232,30.33 6.432,30.33 v2(7.232,31.13) 7.032,31.13 v2(6.532,30.63) 6.232,30.33
5V_PER: X1.42 | length 5
  Bottom Layer w0.5: X1.42 7.43,31.93
B505_CLKa_N: X1.50
B505_CLKa_P: X1.52
CAN_BUSES.PS_CAN0_RX: X1.37
CAN_BUSES.PS_CAN0_TX: X1.38
CAN_BUSES.PS_CAN1_RX: X1.35
CAN_BUSES.PS_CAN1_TX: X1.36
D_USB_N: D1.2 X1.1 X2.2 | length 20
  Top Layer w0.114: X1.1 3.889,47.93 4.182,47.637 8.665,47.637 9.502,46.8 14.802,46.8 16.207,45.395 16.207,44.375 16.5,44.082 X2.2 16.5,41.35 D1.2
D_USB_P: D1.3 X1.3 X2.3 | length 19.9
  Top Layer w0.114: X1.3 3.889,47.13 4.182,47.423 6.521,47.423 6.945,47.423 cw(c6.945,47.309) 7.059,47.309 7.059,47.292 ccw(c7.17,47.292) 7.17,47.182 7.317,47.182 ccw(c7.317,47.292) 7.427,47.292 7.427,47.309 cw(c7.541,47.309) 7.541,47.423 7.8,47.423 8.577,47.423 9.414,46.586 14.714,46.586 15.993,45.307 15.993,44.376 15.7,44.083 X2.3 15.7,41.35 D1.3
ETH0_0_N: TP2.1 X1.84 | length 10.6
  Bottom Layer w0.1: X1.84 3.882,11.93 4.171,11.641 4.5,11.641 4.659,11.8 6.592,11.8 9.42,8.972 10.44,8.972 TP2.1
ETH0_0_P: TP1.1 X1.86 | length 10.6
  Bottom Layer w0.1: X1.86 3.882,11.13 4.171,11.419 4.592,11.419 4.751,11.578 6.5,11.578 9.328,8.75 10.44,8.75 TP1.1
ETH0_1_N: TP4.1 X1.78 | length 10.6
  Bottom Layer w0.1: X1.78 3.882,14.33 4.171,14.041 4.5,14.041 4.659,14.2 6.592,14.2 7.653,13.139 11.172,13.139 TP4.1
ETH0_1_P: TP3.1 X1.80 | length 10.6
  Bottom Layer w0.1: X1.80 3.882,13.53 4.171,13.819 4.592,13.819 4.751,13.978 6.5,13.978 7.561,12.918 11.172,12.918 TP3.1
ETH0_2_N: TP6.1 X1.72 | length 10.6
  Bottom Layer w0.1: X1.72 3.882,16.73 4.171,16.441 4.5,16.441 4.659,16.6 6.5,16.6 7.561,17.661 11.172,17.661 TP6.1
ETH0_2_P: TP5.1 X1.74 | length 10.6
  Bottom Layer w0.1: X1.74 3.882,15.93 4.171,16.219 4.592,16.219 4.751,16.378 6.592,16.378 7.653,17.439 11.172,17.439 TP5.1
ETH0_3_N: TP8.1 X1.66 | length 10.6
  Bottom Layer w0.1: X1.66 3.882,19.13 4.171,18.841 4.5,18.841 4.659,19 6.5,19 9.328,21.828 10.44,21.828 TP8.1
ETH0_3_P: TP7.1 X1.68 | length 10.6
  Bottom Layer w0.1: X1.68 3.882,18.33 4.171,18.619 4.592,18.619 4.751,18.778 6.592,18.778 9.42,21.607 10.44,21.607 TP7.1
ETH0_LED1-: D11.1 X1.98 | length 7.4
  Bottom Layer w0.2: X1.98 4.03,6.33 4.4,6.7 6.6,6.7 D11.1
ETH0_LED2-: D10.1 X1.100 | length 5.7
  Bottom Layer w0.2: X1.100 4.03,5.53 4.7,6.2 5.564,6.2 6.234,5.53 6.234,5.266 D10.1
ETH1_MDC: X1.94
ETH1_MDIO: X1.92
ETH1_R\S\T\: X1.90
ExternalSTOP: SWE.2 X1.57 | length 31.6
  Top Layer w0.1: X1.57 7.67,22.33 17.5,12.5 17.5,11.15 v1(16.05,9.7)
  Bottom Layer w0.1: v1(16.05,9.7) 16.5,9.7 17.3,8.9 17.3,7.5 17,7.2 15.4,7.2 15,6.8 15,5.6 16.19,4.41 SWE.2
FrontpanelUI-BB.PwrLEDb: D3.1 X1.85 | length 20.8
  Top Layer w0.1: X1.85 2.602,11.3 6.1,11.3 12.9,4.5 v1(18.5,4.5)
  Bottom Layer w0.15: v1(18.5,4.5) 18.8,4.5 D3.1
FrontpanelUI-BB.PwrLEDg: D5.1 X1.81 | length 20.7
  Top Layer w0.1: X1.81 2.562,12.6 6,12.6 12.3,6.3 v1(17.9,6.3)
  Bottom Layer w0.15: v1(17.9,6.3) 18.4,6.8 18.4,8.5 D5.1
FrontpanelUI-BB.PwrLEDr: D2.1 X1.83 | length 20.4
  Top Layer w0.1: X1.83 6.07,11.93 12.5,5.5 v1(18.5,5.5)
  Bottom Layer w0.15: v1(18.5,5.5) 19.1,6.1 19.1,6.4 D2.1
FrontpanelUI-BB.StopLED: D4.1 X1.77 | length 20.9
  Top Layer w0.1: X1.77 6.67,14.33 13.7,7.3 v1(17.9,7.3)
  Bottom Layer w0.15: D4.1 17,6.4 v1(17.9,7.3)
FrontpanelUI-BB.UsrSW1: SW1.2 X1.71 | length 22
  Top Layer w0.1: X1.71 12.37,16.73 v1(16.9,12.2) ; v1(19.45,13.3) 19.45,14.035 SW1.2
  Bottom Layer w0.1: v1(16.9,12.2) 16.9,13.7 17.4,14.2 18.65,14.2 19.45,13.4 v1(19.45,13.3)
FrontpanelUI-BB.UsrSW2: SW2.2 X1.73 | length 34.1
  Top Layer w0.1: X1.73 2.602,16.1 7.5,16.1 14.6,9 17.5,9 18.1,9.6 18.1,13 17,14.1 17,18.8 v1(17.2,19) ; v1(18.5,20.3) 19.59,21.39 SW2.2
  Bottom Layer w0.1: v1(17.2,19) 17.3,19 18.5,20.2 v1(18.5,20.3)
FrontpanelUI-BB.UsrSW3: SW3.2 X1.75 | length 43.7
  Top Layer w0.1: X1.75 2.477,15.085 7,15.085 13.585,8.5 17.5,8.5 18.5,9.5 18.5,13 17.5,14 17.5,18.6 17.7,18.8 17.7,19.2 17.2,19.7 v1(17.2,19.8) ; v1(17.9,20.7) 17.9,30.6 19.475,32.175 SW3.2
  Bottom Layer w0.1: v1(17.2,19.8) 17.2,19.9 17.9,20.6 v1(17.9,20.7)
FrontpanelUI-FF.UsrLED1: R53.1 X1.33 | length 14.2
  Top Layer w0.15: X1.33 4.332,35.13 v1(4.532,34.93)
  Bottom Layer w0.15: v1(4.532,34.93) 6.07,34.93 R53.1
FrontpanelUI-FF.UsrLED2: R54.1 X1.34 | length 13.4
  Bottom Layer w0.1: 4.332,35.33 4.732,35.33
  Bottom Layer w0.15: X1.34 2.632,35.33 4.332,35.33 ; 4.732,35.33 8.17,35.33 R54.1
FrontpanelUI-FF.UsrLED3: R55.1 X1.31 | length 12.5
  Top Layer w0.15: X1.31 4.332,35.93 v1(4.532,35.73)
  Bottom Layer w0.15: v1(4.532,35.73) 10.27,35.73 R55.1
FrontpanelUI-FF.UsrLED4: R56.1 X1.32 | length 11.6
  Bottom Layer w0.1: 4.332,36.13 4.732,36.13
  Bottom Layer w0.15: X1.32 2.632,36.13 4.332,36.13 ; 4.732,36.13 12.37,36.13 R56.1
GND: X1.5 X1.6 X1.11 X1.12 X1.17 X1.18 X1.23 X1.24 X1.29 X1.30 X1.48 X1.54 X1.64 X1.70 X1.76 X1.82 X1.87 X1.88 X1.93 X1.99 | length 54.3
  Top Layer w0.5: X1.99 v2(5.132,5.53) ; X1.93 v2(5.132,7.93) ; X1.87 5.5,10.33 v2(5.9,10.73) ; X1.29 v2(4.5,36.73) ; X1.23 v2(4.5,39.13) ; X1.17 v2(4.5,41.53) ; X1.11 v2(4.5,43.93) ; X1.5 4.5,46.33 v2(4.9,45.93)
  Bottom Layer w0.5: X1.88 5.5,10.33 v2(5.9,10.73) ; X1.82 5.5,12.73 v2(5.9,13.13) ; X1.76 5.5,15.13 v2(5.9,15.53) ; X1.70 5.5,17.53 v2(5.9,17.93) ; X1.64 5.5,19.93 v2(5.9,20.33) ; X1.54 4.5,27.13 v2(4.9,27.53) ; X1.48 v2(5.132,29.53) ; X1.30 v2(4.5,36.73) ; X1.24 v2(4.5,39.13) ; X1.18 v2(4.5,41.53) ; X1.12 v2(4.5,43.93) ; X1.6 4.5,46.33 v2(4.9,45.93)
GTR0_RX_N: X1.8
GTR0_RX_P: X1.10
GTR0_TX_N: X1.14
GTR0_TX_P: X1.16
GTR1_RX_N: X1.7
GTR1_RX_P: X1.9
GTR1_TX_N: X1.13
GTR1_TX_P: X1.15
GTR2_RX_N: X1.20
GTR2_RX_P: X1.22
GTR2_TX_N: X1.26
GTR2_TX_P: X1.28
GTR3_RX_N: X1.19
GTR3_RX_P: X1.21
GTR3_TX_N: X1.25
GTR3_TX_P: X1.27
I2C_SYS_3V3.SCL: X1.41
I2C_SYS_3V3.SDA: X1.43
isoGND: D1.1 X1.2 X2.5 X2.S1 X2.S2 X2.S3 X2.S4
  other v1: 18.5,38.5 20,38.5 21,39.5 12.5,41 13.1,43.9 9.5,44 8,46 12.7,48.476 13.7,48.476 14.7,48.476 15.7,48.476 16.7,48.476 17.7,48.476 18.7,48.476 9,49.5 7.5,50 7,51.5
isoIOsEnable: X1.62
isoIOsFlex01: X1.69
isoIOsFlex02: X1.67
isoIOsFlex03: X1.65
isoIOsFlex04: X1.63
isoIOsFlex05: X1.61
isoIOsI\N\T\: X1.60
isoIOsR\S\T\: X1.59
isoIOsSCL: X1.58
isoIOsSDA: X1.55
NetD2_2: D2.2 R1.1 | length 6.1
  Bottom Layer w0.15: D2.2 20.3,6 20.3,7.3 20.95,7.95 R1.1
NetD3_2: D3.2 R2.1 | length 13.2
  Bottom Layer w0.15: D3.2 17.9,3.8 17.9,5.6 18.7,6.4 18.7,7.4 19.1,7.8 19.1,12.1 20,13 20,15.1 R2.1
NetD4_2: D4.2 R3.1 | length 2.9
  Bottom Layer w0.15: D4.2 14.2,7.1 15.3,8.2 R3.1
NetD5_2: D5.2 R4.1 | length 4.9
  Bottom Layer w0.15: D5.2 19.85,8.65 19.85,11.7 20.95,12.8 R4.1
NetD6_1: D6.1 R53.2 | length 11.4
  Bottom Layer w0.15: R53.2 16.5,27.2 17.4,26.3 17.4,22.1 19,20.5 19,18.3 D6.1
NetD7_1: D7.1 R54.2 | length 8.6
  Bottom Layer w0.15: R54.2 17.1,30 17.4,29.7 17.4,27.1 18.2,26.3 D7.1
NetD8_1: D8.1 R55.2 | length 6
  Bottom Layer w0.15: R55.2 17,32.5 18.2,31.3 D8.1
NetD9_1: D9.1 R56.2 | length 3.8
  Bottom Layer w0.15: R56.2 17.5,35 18.2,34.3 D9.1
NetD10_2: D10.2 R5.1 | length 3.8
  Bottom Layer w0.2: D10.2 7.8,3.7 9.47,3.7 R5.1
NetD11_2: D11.2 R6.1 | length 1.4
  Bottom Layer w0.2: D11.2 8.9,3 R6.1
NetSW0_2: SW0.2 X1.79 | length 22
  Top Layer w0.1: X1.79 2.602,13.7 6.2,13.7 13.1,6.8 18.2,6.8 19,6 19,4.6 19.425,4.175 SW0.2
P\E\R\S\T\3V3: X1.45
V_BUS: D1.4 X1.4 X2.1 | length 31.5
  Top Layer w0.25: v1(18,41.901) 17.3,41.901 X2.1 ; v1(18,42.901) X2.1 ; v1(18,43.901) 17.3,43.901 X2.1
  Top Layer w0.45: D1.4 15.6,38.75 ; 15.6,38.75 v1(15.9,38.45) v1(15.9,39.05) 15.6,38.75
  Bottom Layer w0.5: X1.4 5.57,47.13 7.7,45 10,45 13.5,41.5 13.5,40 14.45,39.05 v1(15.9,39.05) ; v1(15.9,38.45) v1(15.9,39.05) ; v1(18,43.901) v1(18,42.901) v1(18,41.901) 18.5,41.401 18.5,40 17.55,39.05 v1(15.9,39.05)
VIN: D6.2 D7.2 D8.2 D9.2 R1.2 R2.2 R3.2 R4.2 X1.56 | length 53.5
  Top Layer w0.5: v2(5.132,23.13) v2(5.832,23.13)
  Bottom Layer w0.5: X1.56 v2(5.132,23.13) v2(5.832,23.13) 5.948,23.13 8.818,26 14.5,26 16.2,24.3 16.2,17 16.7,16.5 R2.2 ; R4.2 R1.2 17.45,11.2 R3.2 16.2,11.45 16.2,13.8 16.7,14.3 R2.2 ; D9.2 D8.2 D7.2 D6.2 19.7,17.5 17.6,15.4 R2.2
pads on no net: MH.1 SW0.MH1 SW0.MH2 SW0.MP1 SW0.MP2 SW1.MH1 SW1.MH2 SW1.MP1 SW1.MP2 SW2.MH1 SW2.MH2 SW2.MP1 SW2.MP2 SW3.MH1 SW3.MH2 SW3.MP1 SW3.MP2 SWE.MH1 SWE.MH2 SWE.MP1 SWE.MP2 X1.47 X1.49 X1.51 X1.53 X1.89 X1.91 X1.95 X1.96 X1.97 X2.4 X2.A X2.B
copper on no net: | length 7.4
  Top Layer w0.1: 6.632,37.53 8.082,37.53 8.371,37.819 ; 6.632,38.33 8.082,38.33 8.371,38.041 ; 6.632,39.93 8.082,39.93 8.371,40.219 ; 6.632,40.73 8.082,40.73 8.371,40.441

## Polygon pours and split planes (outlines as drawn)
isoGND on Int1 (GND) "ISOGND_L02_P013" (solid, pour order 13): 6,53.5 6,50 5,49 0,49 0,46.9 5.2,46.9 14.5,37.6 20.1,37.6 21.5,39 22,39 22,50 20.5,51.5 8.8,51.5 7.8,52.5 7.8,53.3 7.6,53.5
GND on Int1 (GND) "GND_L02_P025" (solid, pour order 25): 0,46.7 5,46.7 5.5,46.2 11.6,46.2 12,46.6 136.1,46.6 136.1,28.6 143.1,21.6 156.5,21.6 156.5,-14.6 126.6,-14.6 126.6,-44.1 109.1,-44.1 109.1,-74.1 123.5,-74.1 123.5,-94.7 121.5,-96.7 105.8,-96.7 103.8,-94.7 103.8,-73.3 101.2,-70.7 0,-70.7
V_BUS on Int6 (GND) "V_BUS_L07_P018" (solid, pour order 18): 6,53.5 6,50 5,49 0,49 0,46.9 5.2,46.9 14.5,37.6 20.1,37.6 21.5,39 22,39 22,50 20.5,51.5 8.8,51.5 7.8,52.5 7.8,53.3 7.6,53.5
GND on Int6 (GND) "GND_L07_P026" (solid, pour order 26): 0,46.7 5,46.7 5.5,46.2 11.6,46.2 12,46.6 136.1,46.6 136.1,28.6 143.1,21.6 156.5,21.6 156.5,-14.6 126.6,-14.6 126.6,-44.1 109.1,-44.1 109.1,-74.1 123.5,-74.1 123.5,-94.7 121.5,-96.7 105.8,-96.7 103.8,-94.7 103.8,-73.3 101.2,-70.7 0,-70.7
isoGND on Bottom Layer "ISOGND_L08_P023" (solid, pour order 23): 6,53.5 6,50 5,49 0,49 0,46.9 5.2,46.9 14.5,37.6 20.1,37.6 21.5,39 22,39 22,50 20.5,51.5 8.8,51.5 7.8,52.5 7.8,53.3 7.6,53.5
isoGND on Top Layer "ISOGND_L01_P024" (solid, pour order 24): 6,53.5 6,50 5,49 0,49 0,46.9 5.2,46.9 14.5,37.6 20.1,37.6 21.5,39 22,39 22,50 20.5,51.5 8.8,51.5 7.8,52.5 7.8,53.3 7.6,53.5
3V3_PER on Int2 (Sign) "3V3_PER_L03_P014" (solid, remove dead copper, pour order 14): 0,46.7 5,46.7 5.5,46.2 11.6,46.2 12,46.6 136.1,46.6 136.1,28.6 143.1,21.6 156.5,21.6 156.5,-14.6 126.6,-14.6 126.6,-44.1 109.1,-44.1 109.1,-74.1 123.5,-74.1 123.5,-94.7 121.5,-96.7 105.8,-96.7 103.8,-94.7 103.8,-73.3 101.2,-70.7 0,-70.7
1V8_PER on Int5 (Sign) "1V8_PER_L06_P017" (solid, remove dead copper, pour order 17): 0,46.7 5,46.7 5.5,46.2 11.6,46.2 12,46.6 136.1,46.6 136.1,28.6 143.1,21.6 156.5,21.6 156.5,-14.6 126.6,-14.6 126.6,-44.1 109.1,-44.1 109.1,-74.1 123.5,-74.1 123.5,-94.7 121.5,-96.7 105.8,-96.7 103.8,-94.7 103.8,-73.3 101.2,-70.7 0,-70.7
GND on Int3 (Sign) "GND_L04_P021" (solid, remove dead copper, pour order 21): 0,46.7 5,46.7 5.5,46.2 11.6,46.2 12,46.6 136.1,46.6 136.1,28.6 143.1,21.6 156.5,21.6 156.5,-14.6 126.6,-14.6 126.6,-44.1 109.1,-44.1 109.1,-74.1 123.5,-74.1 123.5,-94.7 121.5,-96.7 105.8,-96.7 103.8,-94.7 103.8,-73.3 101.2,-70.7 0,-70.7
3V3_PER on Int4 (Sign) "3V3_PER_L05_P022" (solid, remove dead copper, pour order 22): 0,46.7 5,46.7 5.5,46.2 11.6,46.2 12,46.6 136.1,46.6 136.1,28.6 143.1,21.6 156.5,21.6 156.5,-14.6 126.6,-14.6 126.6,-44.1 109.1,-44.1 109.1,-74.1 123.5,-74.1 123.5,-94.7 121.5,-96.7 105.8,-96.7 103.8,-94.7 103.8,-73.3 101.2,-70.7 0,-70.7

## Keep-outs
Int1 (GND):
  rectangle: 0.957,46.755 3.907,47.505
  rectangle: 0.957,47.555 3.907,48.305
  rectangle: 0.957,37.155 3.907,37.905
  rectangle: 0.957,37.955 3.907,38.705
  rectangle: 0.957,44.355 3.907,45.105
  rectangle: 0.957,45.155 3.907,45.905
  rectangle: 0.957,39.555 3.907,40.305
  rectangle: 0.957,40.355 3.907,41.105
  rectangle: 0.957,41.955 3.907,42.705
  rectangle: 0.957,42.755 3.907,43.505
Int6 (GND):
  rectangle: 0.957,28.355 3.907,29.105
  rectangle: 0.957,27.555 3.907,28.305
  rectangle: 0.957,10.755 3.907,11.505
  rectangle: 0.957,11.555 3.907,12.305
  rectangle: 0.957,15.555 3.907,16.305
  rectangle: 0.957,16.355 3.907,17.105
  rectangle: 0.957,13.155 3.907,13.905
  rectangle: 0.957,13.955 3.907,14.705
  rectangle: 0.957,17.955 3.907,18.705
  rectangle: 0.957,18.755 3.907,19.505
  rectangle: 0.957,37.155 3.907,37.905
  rectangle: 0.957,37.955 3.907,38.705
  rectangle: 0.957,39.555 3.907,40.305
  rectangle: 0.957,40.355 3.907,41.105
  rectangle: 0.957,41.955 3.907,42.705
  rectangle: 0.957,42.755 3.907,43.505
  rectangle: 0.957,44.355 3.907,45.105
  rectangle: 0.957,45.155 3.907,45.905
Keep-Out Layer:
  region: 22,39 21.5,39 20.08,37.58 14.5,37.58 5.34,46.74 5.09,46.49 14.5,37.08 20.58,37.08 21,37.5 22,37.5
  region: 5.5,46.58 5.225,46.855 0,46.855 0,46.605 4.975,46.605 5.5,46.08

## Silkscreen, mask and mechanical layers (free items; w line width, h text height)
Top Overlay:
  text "STOP" at 14.746,31.207 h1.52 r90
  text "E-Ctl" at 14.746,21.826 h1.52 r90
  text ".ProjectRevision" at 10.512,13.782 h1.02 r90
  text ".ProjectDate" at 6.512,12.758 h1.02 r90
  text "E-Sys" at 14.238,12.445 h1.52 r90
  text ".Project" at 8.384,3.62 h1.15 r90
  text "Power" at 13.746,2.572 h1.52 r90
Bottom Overlay:
  text ".Author" at 17.246,48.934 h1.02
  text "by" at 19.946,48.934 h1.02
  text "-" at 10.075,21.956 h1.52
  text "3" at 13.575,20.956 h1.52
  text "+" at 10.075,19.956 h1.52
  text "-" at 10.807,17.788 h1.52
  text "2" at 14.307,16.788 h1.52
  text "+" at 10.807,15.788 h1.52
  text "-" at 10.807,13.267 h1.52
  text "1" at 13.799,12.267 h1.52
  text "+" at 10.807,11.267 h1.52
  text "-" at 10.075,9.099 h1.52
  text "0" at 13.575,8.099 h1.52
  text "+" at 10.075,7.099 h1.52
Mechanical 1:
  lines w0.1: 6,49.95 cw(c5,49.95) 5,48.95 0,48.95 0,26.325 5.2,26.325 cw(c5.2,25.125) 5.2,23.925 0,23.925 0,4.5 5,4.5 cw(c5,3.5) 6,3.5 6,0 7.38,0 ccw(c7.38,0.4) 7.78,0.4 7.78,1 cw(c8.78,1) 8.78,2 19,2 ccw(c19,5) 22,5 22,48.5 ccw(c19,48.5) 19,51.5 8.78,51.5 cw(c8.78,52.5) 7.78,52.5 7.78,53.1 ccw(c7.38,53.1) 7.38,53.5 6,53.5 6,50

## Text inside footprints (layer, text, board x,y; h text height)
Serial: Mechanical 5 "SerialNr" at 11,32.2 h0.7 r180